# EAGLE board TC board (EAGLE 8.0.1)
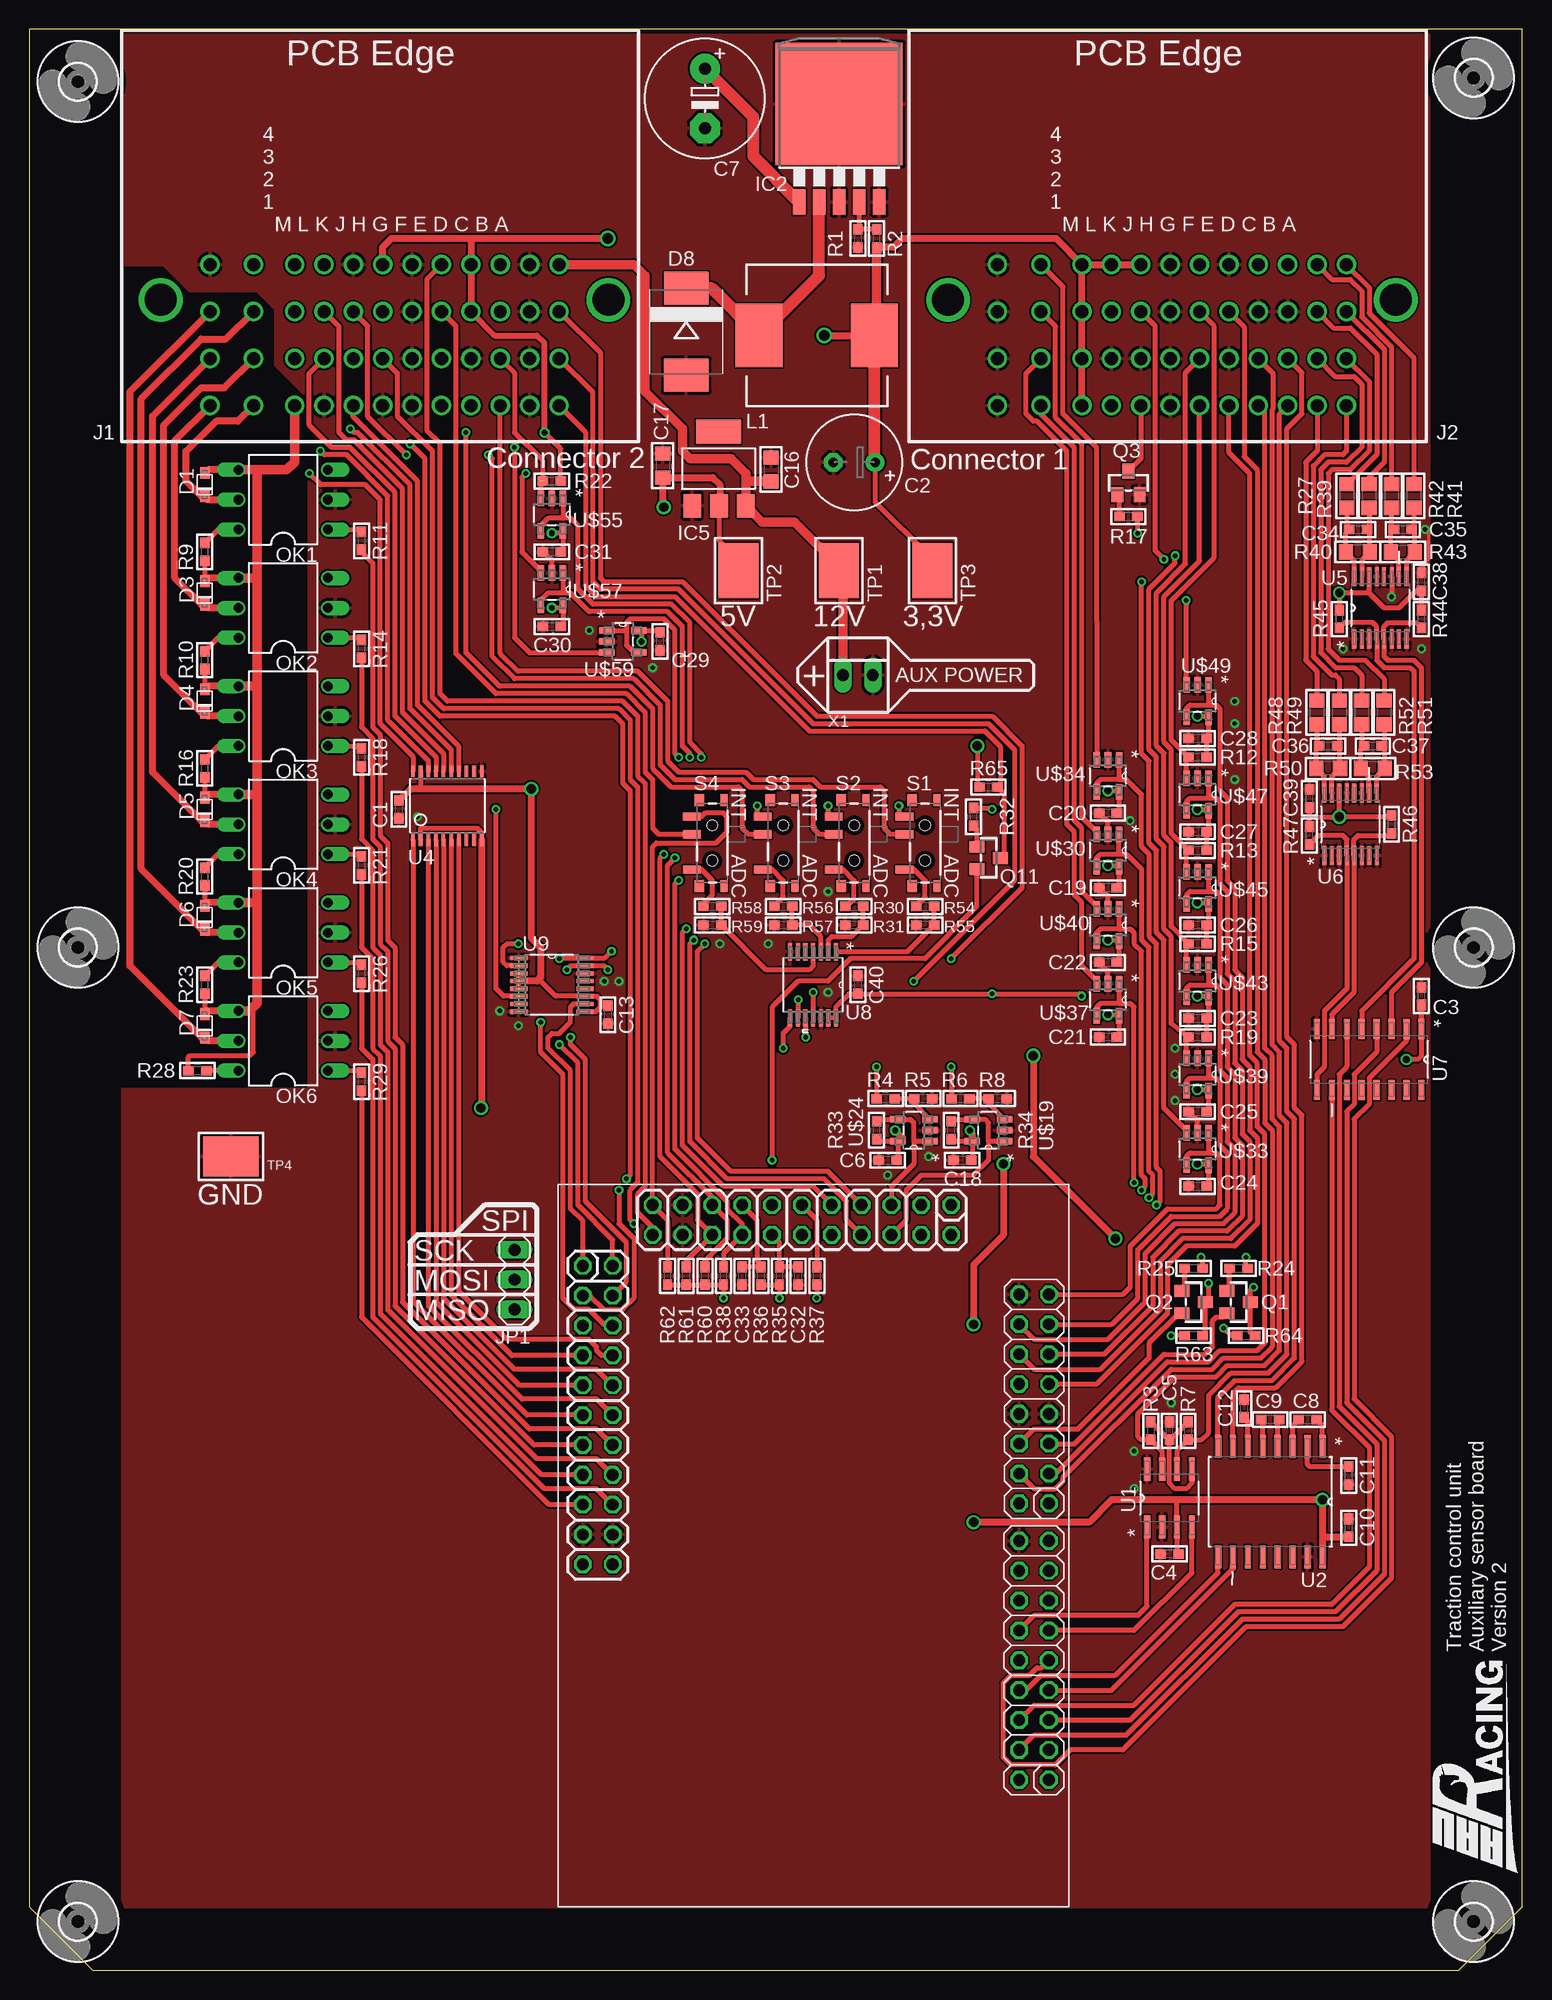
[diagram p0: board, top side]
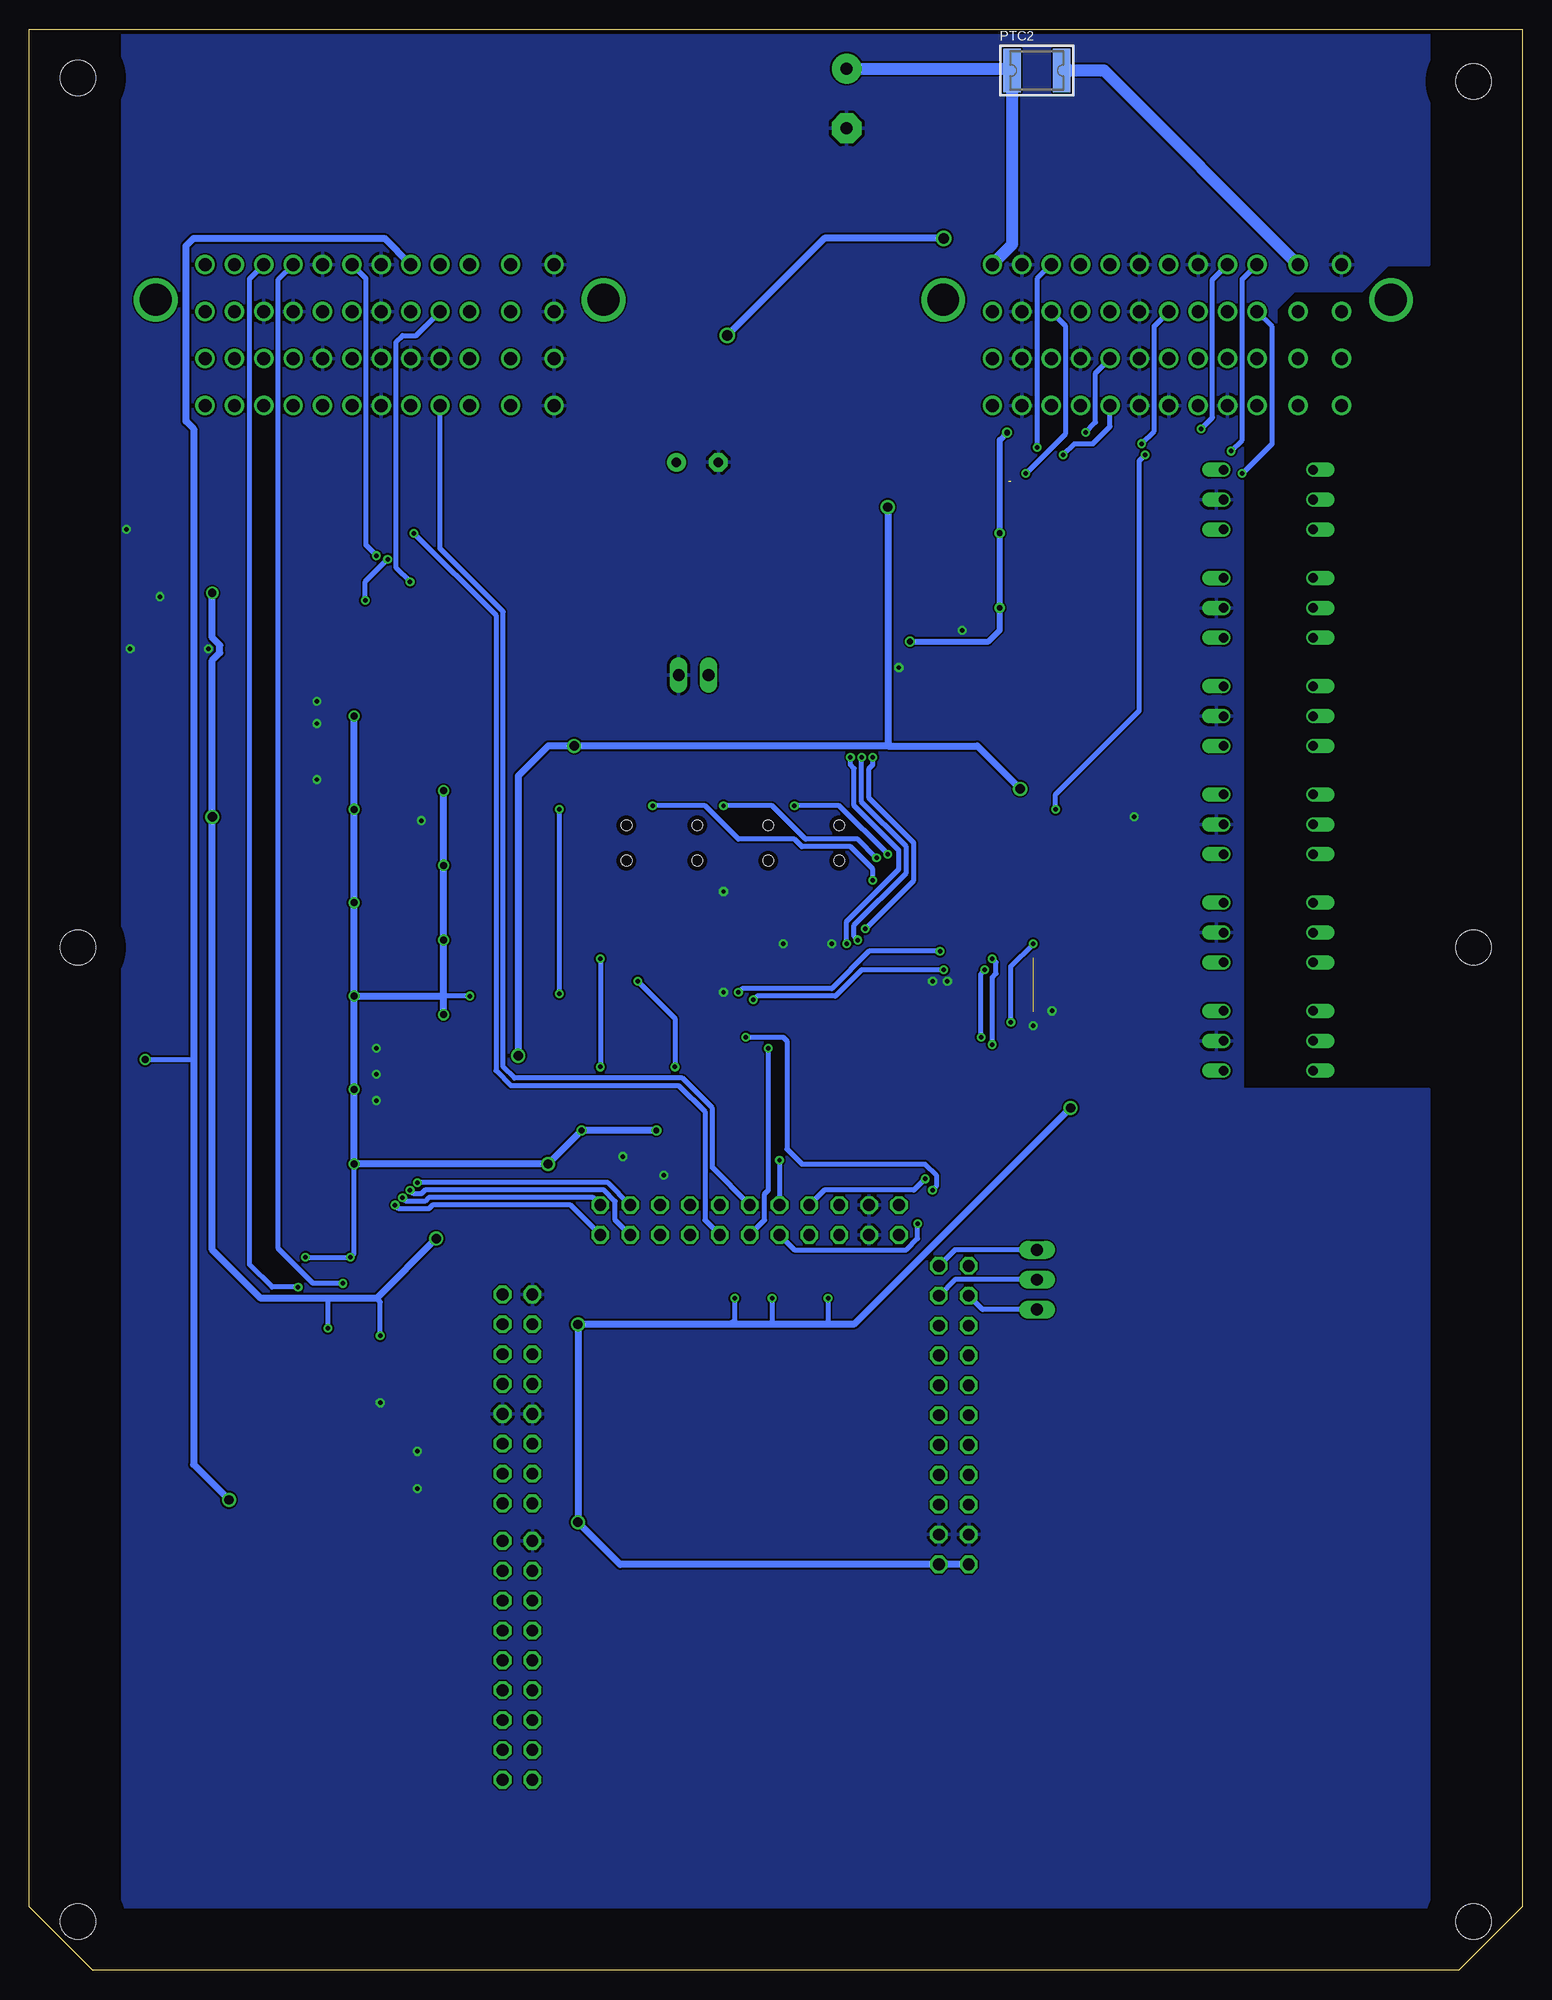
[diagram p1: board, bottom side, seen from below]

Size 127 x 165.1 mm. Coordinates in mm from the lower left corner, seen from the top.
Outline: 0,165.1 0,5.4 5.4,0 121.6,0 127,5.4 127,165.1 0,165.1
Copper layers (1*16): Top 0.0356mm / dielectric 1.5011mm / Bottom 0.0356mm
Design rules "LaenPCBOrder": minimum track width 6mil, minimum drill 13mil, track to track 6mil, track to pad 6mil, pad to pad 6mil, via to via 6mil, smd to smd 6mil, copper to edge 15mil, drill to drill 6mil, minimum pad ring 7mil, minimum via ring 7mil, stop-mask expansion 3mil, vias tented up to drill 0mil, thermal gap 10mil

## Footprints (pad centres in the part's own frame; a part is rotated, then mirrored left to right if it is on the bottom)
_0603 = smd 0.9 x 0.8: 1 -0.762,0; 2 0.762,0
E3,5-8 = drill 0.813 pad 1.6: + -1.778,0 | drill 0.813 pad 1.6 octagon: - 1.778,0
E5-10,5 = drill 1.016 pad 2.54: + -2.54,0 | drill 1.016 pad 2.54 octagon: - 2.54,0
_0805 = smd 1.2 x 1.3: 1 -1.016,0; 2 1.016,0
SOD-323F = smd 1 x 0.8: A -1,0; C 1,0
SMC = smd 2.8 x 3.8: A 3.7,0; C -3.7,0
3,0 = hole 3: 0,0
TO263-5 = smd 1.067 x 2.159: 1 -3.404,-5.791; 2 -1.702,-5.791; 3 0,-5.791; 4 1.702,-5.791; 5 3.404,-5.791 | smd 10.8 x 10.41: 6 0,2.54
SOT223 = smd 1.499 x 2.007: 1 -2.261,-3.15; 2 0.025,-3.15; 3 2.311,-3.15 | smd 3.81 x 2.007: 4 0,3.15
AUTOCONNECTOR = drill 1.1: A1 15.22,-6.92; A2 15.22,-2.92; A3 15.22,1.08; A4 15.22,5.08; B1 12.72,-6.92; B2 12.72,-2.92; B3 12.72,1.08; B4 12.72,5.08; C1 10.22,-6.92; C2 10.22,-2.92; C3 10.22,1.08; C4 10.22,5.08; D1 7.72,-6.92; D2 7.72,-2.92; D3 7.72,1.08; D4 7.72,5.08; E1 5.22,-6.92; E2 5.22,-2.92; E3 5.22,1.08; E4 5.22,5.08; F1 2.72,-6.92; F2 2.72,-2.92; F3 2.72,1.08; F4 2.72,5.08; G1 0.22,-6.92; G2 0.22,-2.92; G3 0.22,1.08; G4 0.22,5.08; H1 -2.28,-6.92; H2 -2.28,-2.92; H3 -2.28,1.08; H4 -2.28,5.08; J1 -4.78,-6.92; J2 -4.78,-2.92; J3 -4.78,1.08; J4 -4.78,5.08; K1 -7.28,-6.92; K2 -7.28,-2.92; K3 -7.28,1.08; K4 -7.28,5.08; L1 -10.78,-6.92; L2 -10.78,-2.92; L3 -10.78,1.08; L4 -10.78,5.08; M1 -14.48,-6.92; M2 -14.48,-2.92; M3 -14.48,1.08; M4 -14.48,5.08 | drill 2.7: SHIELD1 19.42,2.08; SHIELD2 -18.68,2.08
1X03 = drill 1.016 long: 1 -2.54,0; 2 0,0; 3 2.54,0
CDRH125 = smd 5.4 x 4: 1 0,4.9; 2 0,-4.9
DIL06 = drill 0.813 offset: 1 -2.54,-3.81; 2 0,-3.81; 3 2.54,-3.81; 4 2.54,3.81; 5 0,3.81; 6 -2.54,3.81
PTC1812 = smd 1.5 x 3.7: P$1 -2.1,0; P$2 2.1,0
SOT23-WIDE = smd 1 x 1.27: 1 -0.95,-1; 2 0.95,-1; 3 0,1
SWITCH-SPST-SMD-A = smd 0.7 x 1.5: 1 -2.25,-1.75; 2 -0.75,-1.75; 3 2.25,-1.75 | smd 1 x 0.6: GND1 -3.65,1; GND3 3.65,1 | smd 1 x 0.8: GND2 -3.65,-1.1; GND4 3.65,-1.1 | hole 0.9: -1.5,0; 1.5,0
TESTPOINT_SMT = smd 4.7 x 3.4: P$1 0,0
SOIC127P600X175-8N = smd 1.981 x 0.533: 1 -2.464,1.905; 2 -2.464,0.635; 3 -2.464,-0.635; 4 -2.464,-1.905; 5 2.464,-1.905; 6 2.464,-0.635; 7 2.464,0.635; 8 2.464,1.905
SOIC127P1032X265-16N = smd 1.981 x 0.533: 1 -4.699,4.445; 2 -4.699,3.175; 3 -4.699,1.905; 4 -4.699,0.635; 5 -4.699,-0.635; 6 -4.699,-1.905; 7 -4.699,-3.175; 8 -4.699,-4.445; 9 4.699,-4.445; 10 4.699,-3.175; 11 4.699,-1.905; 12 4.699,-0.635; 13 4.699,0.635; 14 4.699,1.905; 15 4.699,3.175; 16 4.699,4.445
TSSOP20 = smd 0.305 x 0.991: 1 -2.925,-2.918; 2 -2.275,-2.918; 3 -1.625,-2.918; 4 -0.975,-2.918; 5 -0.325,-2.918; 6 0.325,-2.918; 7 0.975,-2.918; 8 1.625,-2.918; 9 2.275,-2.918; 10 2.925,-2.918; 11 2.925,2.918; 12 2.275,2.918; 13 1.625,2.918; 14 0.975,2.918; 15 0.325,2.918; 16 -0.325,2.918; 17 -0.975,2.918; 18 -1.625,2.918; 19 -2.275,2.918; 20 -2.925,2.918
SOP63P600X175-16N = smd 1.6 x 0.356: 1 -2.667,2.235; 2 -2.667,1.575; 3 -2.667,0.965; 4 -2.667,0.305; 5 -2.667,-0.305; 6 -2.667,-0.965; 7 -2.667,-1.575; 8 -2.667,-2.235; 9 2.667,-2.235; 10 2.667,-1.575; 11 2.667,-0.965; 12 2.667,-0.305; 13 2.667,0.305; 14 2.667,0.965; 15 2.667,1.575; 16 2.667,2.235
SOIC127P600X175-16N = smd 1.702 x 0.533: 1 -2.591,4.445; 2 -2.591,3.175; 3 -2.591,1.905; 4 -2.591,0.635; 5 -2.591,-0.635; 6 -2.591,-1.905; 7 -2.591,-3.175; 8 -2.591,-4.445; 9 2.591,-4.445; 10 2.591,-3.175; 11 2.591,-1.905; 12 2.591,-0.635; 13 2.591,0.635; 14 2.591,1.905; 15 2.591,3.175; 16 2.591,4.445
SOP65P640X120-14N = smd 1.473 x 0.356: 1 -2.819,1.956; 2 -2.819,1.295; 3 -2.819,0.66; 4 -2.819,0; 5 -2.819,-0.66; 6 -2.819,-1.295; 7 -2.819,-1.956; 8 2.819,-1.956; 9 2.819,-1.295; 10 2.819,-0.66; 11 2.819,0; 12 2.819,0.66; 13 2.819,1.295; 14 2.819,1.956
SOP65P640X120-16N = smd 1.473 x 0.356: 1 -2.819,2.286; 2 -2.819,1.626; 3 -2.819,0.965; 4 -2.819,0.33; 5 -2.819,-0.33; 6 -2.819,-0.965; 7 -2.819,-1.626; 8 -2.819,-2.286; 9 2.819,-2.286; 10 2.819,-1.626; 11 2.819,-0.965; 12 2.819,-0.33; 13 2.819,0.33; 14 2.819,0.965; 15 2.819,1.626; 16 2.819,2.286
CPU-BOARD-JP1 = drill 1 octagon: P$1 1.27,-12.7; P$2 -1.27,-12.7; P$3 1.27,-10.16; P$4 -1.27,-10.16; P$5 1.27,-7.62; P$6 -1.27,-7.62; P$7 1.27,-5.08; P$8 -1.27,-5.08; P$9 1.27,-2.54; P$10 -1.27,-2.54; P$11 1.27,0; P$12 -1.27,0; P$13 1.27,2.54; P$14 -1.27,2.54; P$15 1.27,5.08; P$16 -1.27,5.08; P$17 1.27,7.62; P$18 -1.27,7.62; P$19 1.27,10.16; P$20 -1.27,10.16; P$21 1.27,12.7; P$22 -1.27,12.7; P$23 -3.905,18.637; P$24 -3.905,16.097; P$25 -6.445,18.637; P$26 -6.445,16.097; P$27 -8.985,18.637; P$28 -8.985,16.097; P$29 -11.525,18.637; P$30 -11.525,16.097; P$31 -14.065,18.637; P$32 -14.065,16.097; P$33 -16.605,18.637; P$34 -16.605,16.097; P$35 -19.145,18.637; P$36 -19.145,16.097; P$37 -21.685,18.637; P$38 -21.685,16.097; P$39 -24.225,18.637; P$40 -24.225,16.097; P$41 -26.765,18.637; P$42 -26.765,16.097; P$43 -29.305,18.637; P$44 -29.305,16.097; P$45 -47.625,-21.018; P$46 -47.625,-18.479; P$47 -45.085,-21.018; P$48 -45.085,-18.479; P$49 -42.545,-21.018; P$50 -42.545,-18.479; P$51 -40.005,-21.018; P$52 -40.005,-18.479; P$53 -37.465,-21.018; P$54 -37.465,-18.479; P$55 -34.925,-21.018; P$56 -34.925,-18.479; P$57 -32.385,-21.018; P$58 -32.385,-18.479; P$59 -29.845,-21.018; P$60 -29.845,-18.479; P$61 -27.305,-21.018; P$62 -27.305,-18.479; P$63 -24.115,-21.024; P$64 -24.115,-18.484; P$65 -21.575,-21.024; P$66 -21.575,-18.484; P$67 -19.035,-21.024; P$68 -19.035,-18.484; P$69 -16.495,-21.024; P$70 -16.495,-18.484; P$71 -13.955,-21.024; P$72 -13.955,-18.484; P$73 -11.415,-21.024; P$74 -11.415,-18.484; P$75 -8.875,-21.024; P$76 -8.875,-18.484; P$77 -6.335,-21.024; P$78 -6.335,-18.484
SOT95P270X145-5N = smd 1.321 x 0.559: 1 -1.372,0.94; 2 -1.372,0; 3 -1.372,-0.94; 4 1.372,-0.94; 5 1.372,0.94
22-23-2021 = drill 1 long: 1 -1.27,0; 2 1.27,0

## Placement (x,y rotation side)
C1  100n  [_0603]  31.43,98.74 90 top
C2  220uf  [E3,5-8]  70.17,128.27 180 top
C3  100n  [_0603]  118.43,82.87 90 top
C4  100n  [_0603]  97,35.4 180 top
C5  4n7  [_0603]  97,45.88 90 top
C6  100n  [_0603]  73.03,68.9 0 top
C7  680u  [E5-10,5]  57.47,159.23 270 top
C8  100n  [_0603]  108.74,46.83 180 top
C9  100n  [_0603]  105.57,46.83 180 top
C10  100n  [_0603]  112.24,37.62 270 top
C11  100n  [_0603]  112.24,42.07 270 top
C12  100n  [_0603]  103.35,47.78 270 top
C13  100n  [_0603]  49.21,81.28 270 top
C16  10u  [_0805]  63.09,127.67 270 top
C17  22u  [_0805]  53.88,127.98 270 top
C18  100n  [_0603]  79.38,68.9 0 top
C19  100n  [_0603]  91.76,92.08 0 top
C20  100n  [_0603]  91.76,98.42 0 top
C21  100n  [_0603]  91.76,79.38 0 top
C22  100n  [_0603]  91.76,85.72 0 top
C23  100n  [_0603]  99.38,80.96 0 top
C24  100n  [_0603]  99.38,66.67 0 top
C25  100n  [_0603]  99.38,73.03 0 top
C26  100n  [_0603]  99.38,88.9 0 top
C27  100n  [_0603]  99.38,96.84 0 top
C28  100n  [_0603]  99.38,104.78 0 top
C29  100n  [_0603]  53.66,113.03 90 top
C30  100n  [_0603]  44.45,114.3 0 top
C31  100n  [_0603]  44.45,120.65 0 top
C32  10n  [_0603]  65.41,59.05 270 top
C33  10n  [_0603]  60.64,59.05 270 top
C34  1n  [_0603]  113.03,122.56 0 top
C35  1n  [_0603]  116.84,122.56 180 top
C36  1n  [_0603]  110.49,104.14 0 top
C37  1n  [_0603]  114.3,104.14 180 top
C38  100n  [_0603]  118.43,118.11 90 top
C39  100n  [_0603]  108.9,99.69 90 top
C40  100n  [_0603]  70.48,83.82 90 top
D1  [SOD-323F]  14.92,126.36 270 top
D3  [SOD-323F]  14.92,117.16 270 top
D4  [SOD-323F]  14.92,107.95 270 top
D5  [SOD-323F]  14.92,98.74 270 top
D6  [SOD-323F]  14.92,89.53 270 top
D7  [SOD-323F]  14.92,80.33 270 top
D8  [SMC]  55.88,139.38 270 top
H1  MOUNT-HOLE3.0  [3,0]  4.13,160.66 0 top
H2  MOUNT-HOLE3.0  [3,0]  4.13,87 0 top
H3  MOUNT-HOLE3.0  [3,0]  4.13,4.13 0 top
H4  MOUNT-HOLE3.0  [3,0]  122.87,4.13 0 top
H5  MOUNT-HOLE3.0  [3,0]  122.87,160.97 0 top
H6  MOUNT-HOLE3.0  [3,0]  122.87,87 0 top
IC2  lm2575  [TO263-5]  68.9,156.21 0 top
IC5  REG1117  [SOT223]  58.64,127.73 0 top
J1  CON1  [AUTOCONNECTOR]  29.84,140.02 0 top
J2  CON1  [AUTOCONNECTOR]  96.84,140.02 0 top
JP1  SPI  [1X03]  41.27,58.74 90 top
L1  MSS1278-224KLD  [CDRH125]  66.99,139.06 90 top
OK1  4N35  [DIL06]  21.59,125.09 90 top
OK2  4N35  [DIL06]  21.59,115.89 90 top
OK3  4N35  [DIL06]  21.59,106.68 90 top
OK4  4N35  [DIL06]  21.59,97.47 90 top
OK5  4N35  [DIL06]  21.59,88.27 90 top
OK6  4N35  [DIL06]  21.59,79.06 90 top
PTC2  [PTC1812]  41.27,161.61 0 bottom
Q1  [SOT23-WIDE]  102.87,56.83 270 top
Q2  [SOT23-WIDE]  99.06,56.83 270 top
Q3  [SOT23-WIDE]  93.5,126.52 0 top
Q11  [SOT23-WIDE]  81.6,94.61 270 top
R1  1k  [_0603]  70.48,147.32 90 top
R2  1k69  [_0603]  72.07,147.32 90 top
R3  60  [_0603]  95.41,45.88 90 top
R4  499  [_0603]  72.87,74.14 180 top
R5  976  [_0603]  76.04,74.14 180 top
R6  499  [_0603]  79.22,74.14 180 top
R7  60  [_0603]  98.58,45.88 90 top
R8  976  [_0603]  82.39,74.14 180 top
R9  500  [_0603]  14.92,120.65 270 top
R10  500  [_0603]  14.92,111.44 270 top
R11  120  [_0603]  28.26,121.6 270 top
R12  10k  [_0603]  99.38,103.19 180 top
R13  10k  [_0603]  99.38,95.25 180 top
R14  120  [_0603]  28.26,112.39 270 top
R15  10k  [_0603]  99.38,87.31 180 top
R16  500  [_0603]  14.92,102.23 270 top
R17  500  [_0603]  93.5,123.67 0 top
R18  120  [_0603]  28.26,103.19 270 top
R19  10k  [_0603]  99.38,79.38 180 top
R20  500  [_0603]  14.92,93.03 270 top
R21  120  [_0603]  28.26,93.98 270 top
R22  10k  [_0603]  44.45,126.68 180 top
R23  500  [_0603]  14.92,83.82 270 top
R24  500  [_0603]  102.87,59.69 180 top
R25  500  [_0603]  99.06,59.69 180 top
R26  120  [_0603]  28.26,84.77 270 top
R27  10k 0W5  [_0805]  112.08,125.41 270 top
R28  500  [_0603]  14.29,76.52 180 top
R29  120  [_0603]  28.26,75.56 270 top
R30  499  [_0603]  70.17,90.49 180 top
R31  976  [_0603]  70.17,88.9 0 top
R32  500  [_0603]  80.33,98.11 270 top
R33  10k  [_0603]  72.07,71.44 270 top
R34  10k  [_0603]  78.42,71.44 270 top
R35  10k  [_0603]  63.82,59.05 90 top
R36  10k  [_0603]  62.23,59.05 90 top
R37  10k  [_0603]  66.99,59.05 90 top
R38  10k  [_0603]  59.05,59.05 90 top
R39  10k 0W5  [_0805]  113.98,125.41 270 top
R40  [_0805]  113.03,120.65 180 top
R41  10k 0W5  [_0805]  117.79,125.41 270 top
R42  10k 0W5  [_0805]  115.89,125.41 270 top
R43  [_0805]  116.84,120.65 0 top
R44  1k  [_0603]  118.43,114.94 90 top
R45  1k  [_0603]  111.44,114.94 90 top
R46  1k  [_0603]  115.89,97.47 90 top
R47  1k  [_0603]  108.9,96.52 90 top
R48  10k 0W5  [_0805]  109.54,107 270 top
R49  10k 0W5  [_0805]  111.44,107 270 top
R50  [_0805]  110.49,102.23 180 top
R51  10k 0W5  [_0805]  115.25,107 270 top
R52  10k 0W5  [_0805]  113.35,107 270 top
R53  [_0805]  114.3,102.23 0 top
R54  499  [_0603]  76.2,90.49 180 top
R55  976  [_0603]  76.2,88.9 0 top
R56  499  [_0603]  64.14,90.49 180 top
R57  976  [_0603]  64.14,88.9 0 top
R58  499  [_0603]  58.1,90.49 180 top
R59  976  [_0603]  58.1,88.9 0 top
R60  10k  [_0603]  57.47,59.05 90 top
R61  10k  [_0603]  55.88,59.05 90 top
R62  10k  [_0603]  54.29,59.05 90 top
R63  500  [_0603]  99.06,53.98 0 top
R64  500  [_0603]  103.5,53.98 0 top
R65  500  [_0603]  81.6,100.65 0 top
S1  [SWITCH-SPST-SMD-A]  76.2,95.89 270 top
S2  [SWITCH-SPST-SMD-A]  70.17,95.89 270 top
S3  [SWITCH-SPST-SMD-A]  64.14,95.89 270 top
S4  [SWITCH-SPST-SMD-A]  58.1,95.89 270 top
TP1  [TESTPOINT_SMT]  68.9,119.06 90 top
TP2  [TESTPOINT_SMT]  60.33,119.06 90 top
TP3  [TESTPOINT_SMT]  76.83,119.06 90 top
TP4  [TESTPOINT_SMT]  17.14,69.22 0 top
U1  MAX13052ESA+  [SOIC127P600X175-8N]  97,40.16 90 top
U2  MAX232AEWE+  [SOIC127P1032X265-16N]  105.57,39.85 270 top
U4  [TSSOP20]  35.56,99.06 0 top
U5  MAX9926  [SOP63P600X175-16N]  114.94,115.89 90 top
U6  MAX9926  [SOP63P600X175-16N]  112.39,97.47 90 top
U7  HEF4049BT  [SOIC127P600X175-16N]  113.98,77.47 270 top
U8  MCP3004-I/ST  [SOP65P640X120-14N]  66.67,83.82 270 top
U9  AD5024BRUZ  [SOP65P640X120-16N]  44.45,83.82 0 top
U$1  CPU-BOARD  [CPU-BOARD-JP1]  65.72,63.82 90 top
U$19  MCP6001T-E/OT  [SOT95P270X145-5N]  81.6,71.44 180 top
U$24  MCP6001T-E/OT  [SOT95P270X145-5N]  75.25,71.44 180 top
U$30  MCP6001T-E/OT  [SOT95P270X145-5N]  91.76,95.25 270 top
U$33  MCP6001T-E/OT  [SOT95P270X145-5N]  99.38,69.85 270 top
U$34  MCP6001T-E/OT  [SOT95P270X145-5N]  91.76,101.6 270 top
U$37  MCP6001T-E/OT  [SOT95P270X145-5N]  91.76,82.55 270 top
U$39  MCP6001T-E/OT  [SOT95P270X145-5N]  99.38,76.2 270 top
U$40  MCP6001T-E/OT  [SOT95P270X145-5N]  91.76,88.9 270 top
U$43  MCP6001T-E/OT  [SOT95P270X145-5N]  99.38,84.14 270 top
U$45  MCP6001T-E/OT  [SOT95P270X145-5N]  99.38,92.08 270 top
U$47  MCP6001T-E/OT  [SOT95P270X145-5N]  99.38,100.01 270 top
U$49  MCP6001T-E/OT  [SOT95P270X145-5N]  99.38,107.95 270 top
U$55  MCP6001T-E/OT  [SOT95P270X145-5N]  44.45,123.83 270 top
U$57  MCP6001T-E/OT  [SOT95P270X145-5N]  44.45,117.47 270 top
U$59  MCP6001T-E/OT  [SOT95P270X145-5N]  50.48,113.03 0 top
X1  [22-23-2021]  70.48,110.17 0 top

## Library data of the parts
C1 C3-C6 C8-C13 C16-C40 PTC2 Q1-Q3 Q11 R1-R65 TP1-TP4 = microbuilder
C2 C7 = rcl
D1 D3-D7 U4 = adafruit
D8 = diode
H1-H6 = holes
IC2 = linear
IC5 = burr-brown; MPN: REG1117; OC_FARNELL: 1097566; OC_NEWARK: 14P6981
J1 J2 U$1 = unicorn_v2
JP1 = pinhead
L1 = SparkFun-Passives
OK1-OK6 = optocoupler; MF: FAIRCHILD SEMICONDUCTOR; MPN: 4N35; OC_FARNELL: 1328375; OC_NEWARK: 72K9946
S1-S4 = SparkFun-Electromechanical; PROD_ID: SWCH-10651
U1 = Maxim_By_element14_Batch_1; MPN: MAX13052ESA+; OC_FARNELL: 1600112; OC_NEWARK: 99K2875; PACKAGE: SOIC-8; SUPPLIER: Maxim
U2 = Maxim_By_element14_Batch_1; MPN: MAX232AEWE+; OC_FARNELL: 9724400; OC_NEWARK: 67K4435; PACKAGE: SOIC-16; SUPPLIER: Maxim
U5 U6 = Maxim_By_element14_Batch_1; MPN: MAX9927AEE+; OC_FARNELL: 1845723; OC_NEWARK: 80P4723; PACKAGE: QSOP-16; SUPPLIER: Maxim
U7 = NXP_By_element14_Batch_1; MPN: HEF4049BT; OC_FARNELL: 1201290; OC_NEWARK: 25M9617; PACKAGE: SOIC-16; SUPPLIER: NXP
U8 = Microchip_By_element14_Batch_1; MPN: MCP3004-I/ST; OC_FARNELL: 1523365; OC_NEWARK: 74M3032; PACKAGE: 14TSSOP; SUPPLIER: Microchip
U9 = AAU-Racing; MPN: AD5024BRUZ; OC_FARNELL: 2067817; OC_NEWARK: 07P8929; PACKAGE: TSSOP-16; SUPPLIER: Analog Devices
U$19 U$24 U$30 U$33 U$34 U$37 U$39 U$40 U$43 U$45 U$47 U$49 U$55 U$57 U$59 = Microchip_By_element14_Batch_1; MPN: MCP6001T-E/OT; OC_FARNELL: 1332116; OC_NEWARK: 34M7471; PACKAGE: SOT23-5; SUPPLIER: Microchip
X1 = con-molex; MF: MOLEX; MPN: 22-23-2021; OC_FARNELL: 1462926; OC_NEWARK: 25C3832

## Nets
3.3V: C2.+ C3.1 C4.1 C6.2 C10.2 C18.2 C19.2 C20.2 C21.2 C22.2 C23.2 C24.2 C25.2 C26.2 C27.2 C28.2 C29.2 C30.2 C31.2 C40.1 J1.D3 J1.D4 J1.G4 J2.H4 J2.J4 J2.K1 J2.K2 J2.K3 J2.K4 L1.2 R2.1 R12.1 R13.1 R15.1 R19.1 R22.1 R24.1 R25.1 R32.1 R33.2 R34.2 R35.1 R36.1 R37.1 R38.1 R60.1 R61.1 R62.1 TP3.P$1 U1.3 U2.16 U4.2 U4.10 U7.1 U8.13 U8.14 U$1.P$43 U$1.P$44 U$19.5 U$24.5 U$30.5 U$33.5 U$34.5 U$37.5 U$39.5 U$40.5 U$43.5 U$45.5 U$47.5 U$49.5 U$55.5 U$57.5 U$59.5
5.0V: C1.2 C13.1 C17.2 C38.1 C39.1 IC5.2 R44.2 R45.2 R46.2 R47.2 R63.1 R64.1 R65.1 TP2.P$1 U4.19 U5.14 U6.14 U9.3 U9.4 U9.5 U9.9 U9.11
12V: C7.+ C16.2 IC2.1 IC5.3 J1.A4 PTC2.P$1 TP1.P$1 X1.1
ADC_CS: U8.8 U$1.P$12
AUX2: J1.E1 S2.2
AUX2I: R60.2 S2.1 U$1.P$17
AUX3: J1.E2 S3.2
AUX3I: R61.2 S3.1 U$1.P$18
AUX4: J1.E3 S4.2
AUX4I: R62.2 S4.1 U$1.P$21
AUX5: J1.E4 U$1.P$22
AUX6: J2.E1 U$1.P$65
AUX7: J2.E3 U$1.P$66
BITE: J1.A1 Q11.3 R65.2
BITEL: Q11.2 U$1.P$13
BRAKE-POT: J1.C3 U$57.3
BRAKE-POTB: U$1.P$8 U$57.1 U$57.4
BRAKEP: J2.F4 R19.2 U$39.3
BRAKEP2: J2.F2 R15.2 U$43.3
BRAKEP2B: U$1.P$76 U$43.1 U$43.4
BRAKEPB: U$1.P$75 U$39.1 U$39.4
CAN_RX: U1.4 U$1.P$55
CAN_TX: U1.1 U$1.P$56
CANH: J2.D2 R7.1 U1.6
CANL: J2.D1 R3.1 U1.7
CLUTCH-POT: J1.C4 U$59.3
CLUTCH-POTB: U$1.P$9 U$59.1 U$59.4
COMRX: U2.9 U$1.P$52
COMTX: U2.10 U$1.P$51
DACCLR: U9.10 U$1.P$23
DACCS: U9.2 U$1.P$28
ECU1: J2.C4 Q1.3 R64.2
ECU1L: Q1.2 U$1.P$67
ECU2: J2.D4 Q2.3 R63.2
ECU2L: Q2.2 U$1.P$68
ENCODER1: C32.1 J1.G2 R35.2 U$1.P$14
ENCODER2: C33.1 J1.G3 R36.2 U$1.P$15
FUELTEMP: J1.C2 R22.2 U$55.3
FUELTEMPB: U$1.P$7 U$55.1 U$55.4
GEARPOSAN: J2.H3 U$49.3
GEARPOSANB: U$1.P$71 U$49.1 U$49.4
GND: C1.1 C2.- C3.2 C4.2 C5.2 C6.1 C7.- C10.1 C11.2 C12.1 C13.2 C16.1 C17.1 C18.1 C19.1 C20.1 C21.1 C22.1 C23.1 C24.1 C25.1 C26.1 C27.1 C28.1 C29.1 C30.1 C31.1 C32.2 C33.2 C38.2 C39.2 C40.2 D8.A IC2.3 IC2.5 IC2.6 IC5.1 J1.B1 J1.B2 J1.B3 J1.B4 J1.D2 J1.F1 J1.F2 J1.F3 J1.F4 J1.G1 J1.H4 J1.J1 J1.M4 J2.C3 J2.D3 J2.E2 J2.E4 J2.G1 J2.G2 J2.G3 J2.G4 J2.H2 J2.J2 J2.M1 J2.M2 J2.M3 J2.M4 OK1.2 OK2.2 OK3.2 OK4.2 OK5.2 OK6.2 Q3.2 R1.1 R5.1 R8.1 R31.1 R55.1 R57.1 R59.1 TP4.P$1 U1.2 U1.8 U2.15 U4.11 U5.1 U5.3 U5.6 U5.8 U5.11 U5.13 U6.1 U6.3 U6.6 U6.8 U6.11 U6.13 U7.8 U8.7 U8.12 U9.1 U9.8 U9.14 U$1.P$19 U$1.P$20 U$1.P$41 U$1.P$42 U$1.P$62 U$1.P$69 U$1.P$70 U$1.P$78 U$19.2 U$24.2 U$30.2 U$33.2 U$34.2 U$37.2 U$39.2 U$40.2 U$43.2 U$45.2 U$47.2 U$49.2 U$55.2 U$57.2 U$59.2 X1.2
GND-RELAY: D1.A D3.A D4.A D5.A D6.A D7.A J1.K1 OK1.4 OK2.4 OK3.4 OK4.4 OK5.4 OK6.4 R9.2 R10.2 R16.2 R20.2 R23.2 R28.2
GSENS: J1.A2 R4.2
GSENSO: R33.1 U$1.P$5 U$24.1 U$24.4
HB1-DIR: U4.6 U$1.P$29
HB1-DIR-IN: J1.J4 U4.15
HB1-EN: U4.7 U$1.P$30
HB1-EN-IN: J1.H1 U4.14
HB1-PWM: U4.5 U$1.P$32
HB1-PWM-IN: J1.J3 U4.16
HB2-DIR: U4.3 U$1.P$34
HB2-DIR-IN: J1.K4 U4.18
HB2-EN: U4.1 U$1.P$33
HB2-EN-IN: J1.K3 U4.20
HB2-PWM: U4.4 U$1.P$31
HB2-PWM-IN: J1.J2 U4.17
IGNCUT: R17.2 U$1.P$10
IGNCUTO: J2.H1 Q3.3
MISO: JP1.1 U8.10 U$1.P$25
MOSI: JP1.2 U8.9 U9.15 U$1.P$26
N$1: IC2.4 R1.2 R2.2
N$2: D8.C IC2.2 L1.1
N$3: OK1.6 R9.1
N$4: Q11.1 R32.2
N$5: OK3.6 R16.1
N$6: OK1.1 R11.1
N$7: R4.1 R5.2 U$24.3
N$8: OK4.6 R20.1
N$9: OK2.6 R10.1
N$10: OK2.1 R14.1
N$11: C34.1 R27.2 R40.2 U5.16
N$12: C5.1 R3.2 R7.2 U1.5
N$13: C12.2 U2.6
N$14: C9.1 U2.4
N$15: C34.2 R39.2 R40.1 U5.15
N$16: OK3.1 R18.1
N$17: C35.1 R41.2 R43.2 U5.9
N$18: C35.2 R42.2 R43.1 U5.10
N$19: OK4.1 R21.1
N$20: C9.2 U2.5
N$21: C8.2 U2.3
N$22: C8.1 U2.1
N$23: C11.1 U2.2
N$24: Q3.1 R17.1
N$25: OK5.6 R23.1
N$26: OK6.6 R28.1
N$27: OK5.1 R26.1
N$28: R44.1 U5.5 U7.3
N$29: R46.1 U6.5 U7.7
N$30: R30.2 S2.3
N$31: R45.1 U5.4 U7.5
N$32: R6.1 R8.2 U$19.3
N$33: R47.1 U6.4 U7.9
N$34: Q1.1 R24.2
N$35: Q2.1 R25.2
N$36: C36.1 R48.2 R50.2 U6.16
N$38: OK6.1 R29.1
N$39: C37.1 R51.2 R53.2 U6.9
N$40: C37.2 R52.2 R53.1 U6.10
N$41: C36.2 R49.2 R50.1 U6.15
N$42: R54.1 R55.2 U8.1
N$43: R30.1 R31.2 U8.2
N$46: R56.2 S3.3
N$53: R56.1 R57.2 U8.3
N$57: R54.2 S1.3
N$62: R58.2 S4.3
N$65: R58.1 R59.2 U8.4
NEUTRAL: J2.J1 R37.2 U$1.P$11
OC1: R11.2 U$1.P$36
OC2: R14.2 U$1.P$35
OC3: R18.2 U$1.P$38
OC4: R21.2 U$1.P$37
OC5: R26.2 U$1.P$40
OC6: R29.2 U$1.P$39
OILP: J1.C1 S1.2
OILPI: R38.2 S1.1 U$1.P$16
RLY1: D1.C J1.L1 OK1.5
RLY2: D3.C J1.M1 OK2.5
RLY3: D4.C J1.L2 OK3.5
RLY4: D5.C J1.M2 OK4.5
RLY5: D6.C J1.L3 OK5.5
RLY6: D7.C J1.M3 OK6.5
RPM1: U7.10 U$1.P$50
RPM1GIN: J2.B4 R42.1
RPM1IN: J2.A4 R41.1
RPM2: U7.6 U$1.P$49
RPM2GIN: J2.B3 R27.1
RPM2IN: J2.A3 R39.1
RPM3: U7.4 U$1.P$48
RPM3GIN: J2.B2 R52.1
RPM3IN: J2.A2 R51.1
RPM4: U7.2 U$1.P$53
RPM4GIN: J2.B1 R48.1
RPM4IN: J2.A1 R49.1
RS232RX: J2.C1 U2.8
RS232TX: J2.C2 U2.7
SCK: JP1.3 U8.11 U9.16 U$1.P$24
SPEED: J2.J3 U$33.3
SPEEDB: U$1.P$77 U$33.1 U$33.4
TRAVEL1: J2.L3 U$30.3
TRAVEL1B: U$1.P$1 U$30.1 U$30.4
TRAVEL2: J2.L4 U$34.3
TRAVEL2B: U$1.P$2 U$34.1 U$34.4
TRAVEL3: J2.L2 U$37.3
TRAVEL3B: U$1.P$3 U$37.1 U$37.4
TRAVEL4: J2.L1 U$40.3
TRAVEL4B: U$1.P$4 U$40.1 U$40.4
VCC: J1.L4 PTC2.P$2
VOUT: J1.H3 U9.6
VTEMP: J2.F1 R13.2 U$45.3
VTEMP2: J2.F3 R12.2 U$47.3
VTEMP2B: U$1.P$74 U$47.1 U$47.4
VTEMPB: U$1.P$73 U$45.1 U$45.4
YAW: J1.A3 R6.2
YAWO: R34.1 U$1.P$6 U$19.1 U$19.4

## Tracks (layer width: path | path; a pad name or v marks a point on that pad's centre or on a via)
3.3V  (via drill 0.38, 0.5, 0.6, 0.8, 0.8 pad 0.25, 0.9)
  Top 0.406: R2.1 72.07,139.25 L1.2 | U4.10 38.48,96.77 38.1,97.16 33.28,97.16 U4.2 | C4.1 97.63,35.4 U1.3 97.63,39.85 97.79,40.01 | C10.2 111.89,36.83 | 80.28,54.98 v80.33,54.93 | U$24.5 72.25,70.5 R33.2 | U$24.5 73.88,68.99 C6.2 | R34.2 78.6,70.5 U$19.5 80.23,68.99 C18.2 80.33,68.71 | U$24.5 73.89,70.48 74.3,70.48 | C21.2 92.7,79.55 U$37.5 92.6,81.28 v91.76,81.28 | C22.2 92.7,85.9 U$40.5 92.6,87.63 v91.76,87.63 | C19.2 92.7,92.25 U$30.5 92.6,93.98 v91.76,93.98 | C20.2 92.7,98.6 U$34.5 92.6,100.33 v91.76,100.33 | C24.2 100.32,66.85 U$33.5 100.22,68.58 v99.38,68.58 | C25.2 100.32,73.2 U$39.5 100.22,74.93 v99.38,74.93 | v99.38,106.68 100.22,106.68 U$49.5 100.32,104.95 C28.2 R12.1 | v99.38,98.74 100.22,98.74 U$47.5 100.32,97.02 C27.2 R13.1 | v99.38,90.81 100.22,90.81 U$45.5 100.32,89.08 C26.2 R15.1 | v99.38,82.87 100.22,82.87 U$43.5 100.32,81.14 C23.2 R19.1 | C29.2 53.48,113.97 U$59.5 52.07,113.97 v52.07,113.03 | C31.2 45.39,120.65 U$55.5 45.39,122.24 v44.45,122.24 | C30.2 45.39,114.3 U$57.5 45.39,115.89 v44.45,115.89 | v63.82,57.15 R35.1 R36.1 | R37.1 v66.99,57.15 | R22.1 45.21,129.41 v43.81,130.81 | U7.1 C3.1 118.43,77.79 118.11,77.47 v117.16,77.47 | U8.13 U8.14 68.63,81.97 69.72,83.06 C40.1 v81.92,83.06 89.34,83.06 v89.53,82.87 | v59.05,57.15 R38.1 R60.1 R61.1 R62.1 | R32.1 81.79,98.87 v81.92,98.74 | R25.1 99.82,60.52 v99.69,60.64 | R24.1 103.5,59.82 v103.5,60.64 | C2.+ 71.94,124.9 76.52,120.33 76.83,120.33 TP3.P$1
  Top 0.508: v43.81,130.81 43.81,138.43 43.18,139.06 39.6,139.06 J1.D3
  Top 0.61: R2.1 73.53,146.56 74.3,147.32 87.33,147.32 J2.K4 | 110.01,36.83 v110.01,40.01 97.79,40.01 92.08,40.01 90.17,38.1 v80.33,38.1 | 110.01,36.83 U2.16 | 111.89,36.83 110.01,36.83 | 74.3,70.48 74.3,70.8 v73.66,71.44 | U$19.5 80.23,71.22 v80.01,71.44 | v82.87,68.58 82.87,62.55 80.33,60.01 v80.33,54.93 | U4.10 38.48,73.28 v38.42,73.34 | J2.K1 J2.K2 J2.K3 J2.K4 | J2.K4 J2.J4 J2.H4 | J1.D3 J1.D4 37.56,147.32 | J1.G4 30.07,146.59 30.8,147.32 37.56,147.32 | 37.56,147.32 v49.21,147.32 | v67.63,139.06 71.26,139.06 71.89,138.43
  Top 0.813: R2.1 72.07,138.43
  Top 1.016: C2.+ 71.89,128.27 71.89,138.43 L1.2
  Bottom 0.406: v117.16,77.47 113.03,77.47 | v63.82,57.15 63.82,54.98 | v66.99,57.15 66.99,55.29 67.31,54.98 | v89.53,82.87 91.76,82.87 | v59.05,57.15 59.05,54.98 | v81.92,98.74 v81.92,83.06 | v99.38,68.58 99.38,60.96 v99.69,60.64 v103.5,60.64
  Bottom 0.508: v52.07,113.03 45.4,113.03 44.45,113.98 v44.45,115.89 v44.45,122.24 44.45,130.18 v43.81,130.81
  Bottom 0.61: v73.66,71.44 v80.01,71.44 v82.87,68.58 v99.38,68.58 v99.38,74.93 v99.38,82.87 | v91.76,81.28 91.76,82.87 | 91.76,82.87 v91.76,87.63 v91.76,93.98 v91.76,100.33 | v110.01,40.01 113.03,43.02 113.03,77.47 113.03,131.13 113.67,131.76 113.67,146.69 113.03,147.32 96.78,147.32 J2.H4 | v99.38,82.87 v99.38,90.81 v99.38,98.74 v99.38,106.68 | v49.21,147.32 59.37,147.32 v67.63,139.06 | U$1.P$43 U$1.P$44 76.74,34.51 v80.33,38.1 v80.33,54.93 80.33,54.98 67.31,54.98 63.82,54.98 59.05,54.98 56.78,54.98 v38.42,73.34 | v99.38,82.87 91.76,82.87
5.0V  (via drill 0.38, 0.7, 0.8)
  Top 0.406: 108.9,98.42 R47.2 108.9,98.11 v111.44,98.11 | 108.9,98.42 C39.1 | R46.2 115.7,98.42 115.38,98.11 v111.44,98.11 | 108.92,98.44 108.9,98.42 | R44.2 C38.1 117.98,117.35 116.52,115.89 115.25,115.89 113.98,117.16 | U4.19 33.28,100.54 33.34,100.49 | R45.2 v111.44,117.16 113.98,117.16 | U5.14 113.97,117.17 113.98,117.16 | v111.44,98.11 111.44,100.13 U6.14 | v80.64,104.14 80.64,100.84 R65.1 | R64.1 102.23,53.98 v101.6,54.61 | R63.1 v97.16,53.98 | U9.5 U9.4 U9.3 | 43.34,84.3 44.78,82.86 U9.11 48.27,82.86 48.58,82.55 48.58,81.92 | U9.9 48.2,81.53 48.58,81.92 | C13.1 48.7,82.04 48.58,81.92 | IC5.2 58.67,121.67 60.33,120.02 TP2.P$1
  Top 0.61: IC5.2 58.74,124.65 58.74,126.36 58.13,126.97 C17.2 53.88,124.56 v53.98,124.46 | v85.41,77.79 85.41,69.22 v92.39,62.23 | C1.2 32.42,100.49 33.34,100.49 v42.7,100.49 42.7,87.79 43.5,87 43.5,84.45 43.34,84.3 43.18,84.14 41.64,84.14 U9.4
  Bottom 0.406: v111.43,98.12 111.43,97.17 v111.44,98.11 | v97.16,53.98 97.16,56.83 97.47,57.15 | v101.6,54.61 101.6,57.15
  Bottom 0.61: v53.98,124.46 53.98,104.14 | 53.98,104.14 v80.64,104.14 82.87,104.14 85.41,101.6 v85.41,77.79 | 53.98,104.14 46.35,104.14 v42.7,100.49 | v111.44,117.16 111.44,113.35 110.81,112.71 110.81,112.08 111.44,111.44 v111.44,98.11 111.44,61.28 107.31,57.15 101.6,57.15 97.47,57.15 v92.39,62.23
12V
  Top 0.254: 69.22,118.43 69.22,118.75
  Top 0.406: 68.58,119.7 68.58,119.06 TP1.P$1 69.22,119.06 69.22,118.43
  Top 0.813: J1.A4 51.44,145.1 52.39,144.15 52.39,134.3 55.56,131.13 55.56,129.22 56.2,128.59 59.69,128.59 60.96,127.32 60.96,126.68 | 60.96,126.68 IC5.3 62.34,123.19 65.09,123.19 68.58,119.7 | C16.2 60.99,126.65 60.96,126.68 | X1.1 69.22,118.43
  Top 1.016: IC2.1 61.59,154.32 61.59,157.64 C7.+
  Bottom 1.016: J1.A4 45.09,145.12 43.38,146.83 PTC2.P$1 43.53,161.77 C7.+
ADC_CS  (via drill 0.38)
  Top 0.406: U8.8 64.72,80.28 64.14,79.69 v64.14,78.42
  Bottom 0.406: U$1.P$12 64.45,63.82 64.45,66.04 64.14,66.36 v64.14,78.42
AUX2  (via drill 0.38)
  Top 0.406: v39.05,128.91 39.37,128.59 39.37,111.76 41.27,109.86 51.44,109.86 53.66,107.63 53.66,102.55 54.93,101.28 60.64,101.28 61.28,100.65 66.36,100.65 66.67,100.33 66.67,97.16 67.19,96.64 S2.2
  Bottom 0.406: v39.05,128.91 38.1,129.86 36.51,129.86 35.06,131.31 J1.E1
AUX2I  (via drill 0.38)
  Top 0.406: 68.39,98.11 S2.1 67.94,98.14 v67.94,99.06 | R60.2 57.47,60.33 59.37,62.23 59.37,63.82 U$1.P$17 58.1,65.72 54.29,69.53 54.29,93.98 v54.93,94.61
  Bottom 0.406: v54.93,94.61 56.52,96.2 60.96,96.2 63.82,99.06 v67.94,99.06
AUX3  (via drill 0.38)
  Top 0.406: v37.15,130.81 37.15,112.08 40.01,109.22 51.12,109.22 53.02,107.31 53.02,102.23 54.61,100.65 60.33,100.65 60.64,100.33 60.64,97.16 61.16,96.64 S3.2
  Bottom 0.406: v37.15,130.81 36.29,131.67 36.29,135.87 J1.E2
AUX3I  (via drill 0.38)
  Top 0.406: R61.2 55.88,60.33 U$1.P$18 56.83,63.82 56.83,66.04 53.66,69.22 53.66,94.61 v53.98,94.93 | v61.91,99.06 61.91,98.14 S3.1
  Bottom 0.406: v53.98,94.93 58.1,99.06 v61.91,99.06
AUX4
  Top 0.406: J1.E3 36.29,139.87 36.29,111.98 39.69,108.58 50.8,108.58 52.39,107 52.39,101.92 53.02,101.28 53.02,97.16 53.54,96.64 S4.2
AUX4I
  Top 0.406: R62.2 54.29,63.82 U$1.P$21 53.02,95.57 53.34,95.89 58.42,95.89 59.37,96.84 59.37,98.11 59.05,98.42 57.47,98.42 57.15,98.11 56.38,98.11 S4.1 | S4.1 56.2,98.29 | 56.17,98.14 S4.1
AUX5
  Top 0.406: U$1.P$22 53.02,63.18 51.75,64.45 51.75,66.04 52.39,66.67 52.39,100.97 51.75,101.6 51.75,106.68 50.48,107.95 35.56,107.95 34.92,108.58 34.92,129.86 33.85,130.94 33.85,143.88 J1.E4
AUX6
  Top 0.406: U$1.P$65 87.33,42.24 96.84,51.75 100.33,51.75 101.28,52.7 104.46,52.7 105.09,53.34 105.09,71.12 104.46,71.75 104.46,77.15 103.82,77.79 103.82,127.32 102.06,129.08 J2.E1
AUX7
  Top 0.406: J2.E3 103.35,139.81 103.35,128.75 104.46,127.64 104.46,78.11 105.09,77.47 105.09,72.07 105.73,71.44 105.73,53.02 104.78,52.07 101.6,52.07 100.65,51.12 97.16,51.12 87.95,41.91 87.95,41.59 87.31,40.96 85.49,40.96 U$1.P$66
BITE
  Top 0.406: J1.A1 47.31,130.85 47.31,117.79 48.26,116.84 54.93,116.84 66.36,105.41 81.28,105.41 82.6,104.09 82.6,100.89 R65.2 82.92,100.09 82.92,94.93 Q11.3
BITEL  (via drill 0.38)
  Top 0.406: v63.18,68.9 63.18,81.92 65.41,84.14 67.94,84.14 69.85,86.04 76.2,86.04 80.14,90.04 80.6,90.5 Q11.2
  Bottom 0.406: v63.18,68.9 U$1.P$13
BRAKE-POT  (via drill 0.38)
  Top 0.406: U$57.3 43.51,119.05 41.91,120.65 41.91,127 v42.23,127.32
  Bottom 0.406: J1.C3 38.86,139.89 38.86,130.68 v42.23,127.32
BRAKE-POTB  (via drill 0.38)
  Top 0.406: U$1.P$8 69.53,63.82 69.53,65.41 67.63,67.31 59.37,67.31 56.2,70.48 56.2,87.31 v56.52,87.63 | 45.4,117.16 46.04,117.16 47.62,115.57 54.29,115.57 55.56,114.3 55.56,104.14 56.2,103.5 v56.2,103.19 | 45.4,117.16 44.13,117.16 43.51,116.53 U$57.4 | U$57.1 45.4,118.83 45.4,117.16
  Bottom 0.406: v56.52,87.63 56.83,87.95 56.83,88.9 52.39,93.34 52.39,95.57 56.2,99.38 v56.2,103.19
BRAKEP  (via drill 0.38)
  Top 0.406: U$39.3 98.44,79.2 R19.2 97.16,80.52 97.16,87.95 96.52,88.58 96.52,95.57 95.89,96.2 95.89,103.19 95.25,103.82 95.25,117.47 97.47,119.7 v97.47,120.33
  Bottom 0.406: v97.47,120.33 98.36,121.22 98.36,143.9 J2.F4
BRAKEP2
  Top 0.406: U$43.3 98.42,85.52 98.42,87.12 R15.2 97.16,88.77 97.16,95.89 96.52,96.52 96.52,103.5 95.89,104.14 95.89,117.16 98.36,119.63 98.36,135.9 J2.F2
BRAKEP2B
  Top 0.406: U$1.P$76 85.49,53.66 91.76,53.66 94.93,56.83 94.93,60.96 97.47,63.5 101.6,63.5 102.55,64.45 102.55,69.85 101.92,70.48 101.92,75.88 101.28,76.52 101.28,83.5 100.97,83.82 100.33,83.82 | U$43.4 98.44,83.52 98.74,83.82 100.33,83.82 | U$43.1 100.32,83.83 100.33,83.82
BRAKEPB
  Top 0.406: U$1.P$75 92.09,54.94 94.3,57.15 94.3,61.28 97.16,64.14 101.28,64.14 101.92,64.77 101.92,69.53 101.28,70.17 101.28,75.56 100.97,75.88 100.33,75.88 | U$39.4 98.44,75.58 98.74,75.88 100.33,75.88 | U$39.1 100.32,75.89 100.33,75.88
CAN_RX
  Top 0.406: U$1.P$55 93.98,28.89 98.9,33.81 U1.4
CAN_TX
  Top 0.406: U$1.P$56 85.47,30.16 94.3,30.16 95.09,30.96 U1.1
CANH
  Top 0.406: U1.6 97.63,44.16 R7.1 99.73,45.12 100.33,45.72 100.33,48.9 102.23,50.8 105.41,50.8 107,52.39 107,72.07 106.36,72.71 106.36,78.11 105.73,78.74 105.73,132.72 105.82,132.81 105.82,135.83 J2.D2
CANL
  Top 0.406: U1.7 96.36,44.16 R3.1 94.58,45.12 94.3,45.4 94.3,47.31 97.47,50.48 100.97,50.48 101.92,51.44 105.09,51.44 106.36,52.7 106.36,71.75 105.73,72.39 105.73,77.79 105.09,78.42 105.09,132.56 J2.D1
CLUTCH-POT  (via drill 0.38)
  Top 0.406: v41.27,129.54 41.27,113.35 42.55,112.08 49.1,112.08 U$59.3
  Bottom 0.406: J1.C4 41.27,143.89 v41.27,129.54
CLUTCH-POTB  (via drill 0.38)
  Top 0.406: 50.8,113.98 50.8,114.62 51.12,114.94 53.98,114.94 54.93,113.98 54.93,103.5 v55.24,103.19 | 50.8,113.98 50.8,112.71 51.44,112.08 51.84,112.08 U$59.4 | U$59.1 50.79,113.97 50.8,113.98 | U$1.P$9 66.67,66.67 59.05,66.67 55.56,70.17 55.56,88.27 v55.88,88.58
  Bottom 0.406: v55.88,88.58 51.75,92.71 51.75,95.89 55.56,99.69 55.56,102.23 55.24,102.55 v55.24,103.19
COMRX
  Top 0.406: U2.9 101.12,33.81 92.39,25.08 86.04,25.08 84.77,23.81 U$1.P$52
COMTX
  Top 0.406: U$1.P$51 92.08,23.81 102.39,34.13 U2.10
DACCLR
  Top 0.406: U$1.P$23 47.09,63.72 46.04,64.77 46.04,76.52 44.13,78.42 44.13,79.38 44.45,79.69 45.09,79.69 46.04,80.64 46.04,81.92 46.32,82.19 U9.10
DACCS  (via drill 0.38)
  Top 0.406: U$1.P$28 48.99,54.83 47.62,56.2 46.35,56.2 45.4,57.15 45.4,76.2 43.5,78.11 v43.5,80.64 | v41.59,87.31 40.64,87.31 40.32,87 40.32,85.72 40.6,85.45 U9.2
  Bottom 0.406: v43.5,80.64 43.5,85.41 v41.59,87.31
ECU1  (via drill 0.38)
  Top 0.406: R64.2 103.87,54.21 Q1.3 103.87,57.83 v104.14,58.1
  Bottom 0.406: J2.C4 108.27,143.89 108.27,60.01 106.36,58.1 v104.14,58.1
ECU1L
  Top 0.406: U$1.P$67 88.92,44.78 96.52,52.39 100.01,52.39 100.65,53.02 100.65,55.24 100.97,55.56 101.55,55.56 Q1.2
ECU2  (via drill 0.38)
  Top 0.406: R63.2 100.06,54.21 Q2.3 100.33,57.1 v100.33,58.42
  Bottom 0.406: J2.D4 105.82,143.83 105.82,61.37 102.87,58.42 v100.33,58.42
ECU2L
  Top 0.406: U$1.P$68 85.46,46.04 89.22,46.04 95.25,52.07 95.25,53.34 97.79,55.88 Q2.2
ENCODER1  (via drill 0.38)
  Top 0.406: J1.G2 31.3,135.86 31.3,132.21 34.29,129.22 34.29,108.27 35.24,107.31 50.16,107.31 51.12,106.36 51.12,101.28 51.75,100.65 51.75,66.99 51.12,66.36 51.12,63.82 v51.44,63.5 | C32.1 R35.2 63.82,61.91 U$1.P$14
  Bottom 0.406: U$1.P$14 61.91,61.28 52.39,61.28 51.44,62.23 v51.44,63.5
ENCODER2  (via drill 0.38)
  Top 0.406: v32.38,129.86 33.66,128.59 33.66,107.95 34.92,106.68 49.85,106.68 50.48,106.05 50.48,100.97 51.12,100.33 51.12,67.63 v50.8,67.31 | C33.1 R36.2 62.23,60.01 61.91,60.33 61.91,63.82 U$1.P$15
  Bottom 0.406: v32.38,129.86 31.3,130.94 31.3,139.86 J1.G3 | U$1.P$15 59.37,66.36 51.75,66.36 v50.8,67.31
FUELTEMP  (1 unrouted)
  Top 0.406: J1.C2 41.27,135.89 41.27,130.81 43.69,128.4 R22.2 | 43.51,125.42 U$55.3 | 43.51,126.67 43.51,125.42 | 43.51,125.42 43.5,125.41
FUELTEMPB  (via drill 0.38)
  Top 0.406: 45.4,123.51 46.04,123.51 46.67,122.87 46.67,117.47 47.94,116.2 54.61,116.2 56.2,114.62 56.2,104.46 57.15,103.5 v57.15,103.19 | 45.4,123.51 44.13,123.51 43.51,122.89 U$55.4 | U$55.1 45.4,125.18 45.4,123.51 | U$1.P$7 67.94,67.94 59.69,67.94 56.83,70.8 56.83,86.68 v57.47,87.31
  Bottom 0.406: v57.47,87.31 57.47,89.22 53.02,93.66 53.02,95.25 56.83,99.06 56.83,102.23 57.15,102.55 v57.15,103.19
GEARPOSAN  (via drill 0.38)
  Top 0.406: U$49.3 98.44,116.19 v98.42,116.52 | v96.52,120.02 95.79,120.75 95.79,139.87 J2.H3
  Bottom 0.406: v98.42,116.52 98.42,118.11 v96.52,120.02
GEARPOSANB
  Top 0.406: U$1.P$71 90.82,49.86 96.84,55.88 96.84,60.01 98.42,61.59 102.55,61.59 104.46,63.5 104.46,70.8 103.82,71.44 103.82,76.83 103.19,77.47 103.19,84.45 102.55,85.09 102.55,92.08 101.92,92.71 101.92,99.69 101.28,100.33 101.28,107.31 100.97,107.63 100.33,107.63 | U$49.4 98.44,107.33 98.74,107.63 100.33,107.63 | U$49.1 100.32,107.64 100.33,107.63
GND  (via drill 0.38)  (1 unrouted)
  Top 0.305: 118.43,119.38 119.06,120.02 119.06,122.24 v118.75,122.56
  Top 0.406: U$40.2 91.76,91.31 C19.1 | U$30.2 91.76,97.66 C20.1 | U$37.2 91.76,84.96 C22.1 | U$33.2 99.38,72.26 C25.1 | U$57.2 44.45,119.89 C31.1 | C38.2 118.43,119.38 118.75,119.7 | U5.11 115.9,116.85 v115.89,116.84
  other vias: 97.16,48.26 73.03,67.63 76.52,69.22 33.02,98.11 93.98,44.13 93.98,40.96 53.02,110.81 47.62,113.98 118.43,112.39 111.76,112.39 67.94,83.19 58.74,87.31 67.94,91.76 62.87,87.31 93.66,97.79 102.55,101.28 102.55,106.05 102.55,107.95 97.47,73.98 97.47,76.2 97.47,78.42 41.59,80.33 40.01,81.6 48.9,84.14 50.16,84.14
  pour Top: 7.94,5.4 7.94,74.93 23.81,74.93 23.81,133.67 20.95,136.53 20.95,141.29 19.37,142.88 13.65,142.88 11.43,145.1 7.94,145.1 7.94,165.1 119.06,165.1 119.06,5.4
  pour Bottom: 7.94,5.4 7.94,74.93 23.81,74.93 23.81,133.67 20.95,136.53 20.95,141.29 19.37,142.88 13.65,142.88 11.43,145.1 7.94,145.1 7.94,165.1 119.06,165.1 119.06,5.4
GND-RELAY
  Top 0.406: R28.2 13.53,77.66 13.65,77.79 18.73,77.79 19.05,78.11 19.05,81.92 | R23.2 D7.A | R20.2 D6.A | R16.2 D5.A | R10.2 D4.A | R9.2 D3.A
  Top 0.61: OK2.4 15.19,118.43 D3.A | OK1.4 15.19,127.64 D1.A | OK3.4 15.19,109.22 D4.A | OK4.4 15.19,100.01 D5.A | OK5.4 15.19,90.81 D6.A | OK6.4 15.19,81.6 D7.A
  Top 0.813: 19.39,127.64 19.39,118.43 | 19.39,118.43 19.39,109.22 | 19.39,109.22 19.39,100.01 | 19.39,100.01 19.39,90.81 | 19.39,90.81 19.39,84.16 19.37,84.14 19.37,82.23 19.05,81.92 18.73,81.6 OK6.4 | 19.39,127.64 OK1.4 | OK2.4 19.39,118.43 | OK3.4 19.39,109.22 | OK4.4 19.39,100.01 | OK5.4 19.39,90.81 | J1.K1 22.57,128.29 21.91,127.64 19.39,127.64
GSENS  (via drill 0.38)
  Top 0.406: J1.A2 47.94,134.22 47.94,118.11 48.58,117.47 55.24,117.47 66.67,106.05 81.6,106.05 83.82,103.82 83.82,92.71 v75.25,84.14 | v72.07,76.83 72.07,74.14 R4.2
  Bottom 0.406: v75.25,84.14 72.07,80.96 v72.07,76.83
GSENSO
  Top 0.406: R33.1 72.25,72.38 U$24.4 74.94,72.38 75.25,72.07 75.25,70.5 | U$24.1 75.25,70.5 | 75.25,70.5 75.25,68.58 73.34,66.67 U$1.P$5
HB1-DIR
  Top 0.406: U4.6 35.88,57.46 41.05,52.29 U$1.P$29
HB1-DIR-IN  (via drill 0.38)
  Top 0.406: v27.3,131.13 27.62,130.81 27.94,130.81 32.38,126.36 32.38,107.31 35.88,103.81 U4.15
  Bottom 0.406: v27.3,131.13 26.35,132.08 26.35,143.81 J1.J4
HB1-EN
  Top 0.406: U4.7 36.53,57.76 40.64,53.66 47.62,53.66 48.26,53.02 48.26,52.7 48.67,52.29 U$1.P$30
HB1-EN-IN
  Top 0.406: J1.H1 27.57,132.15 31.11,128.59 33.02,126.68 33.02,107.63 36.53,104.12 U4.14
HB1-PWM
  Top 0.406: U4.5 35.23,57.16 41.27,51.12 48.26,51.12 U$1.P$32
HB1-PWM-IN
  Top 0.406: J1.J3 26.35,139.81 26.35,130.81 26.99,130.18 27.62,130.18 31.75,126.05 31.75,107 35.23,103.51 U4.16
HB2-DIR
  Top 0.406: U4.3 33.94,56.55 41.91,48.58 48.26,48.58 U$1.P$34
HB2-DIR-IN  (via drill 0.38)
  Top 0.406: v24.77,129.22 25.08,128.91 26.99,128.91 30.48,125.41 30.48,106.36 33.94,102.91 U4.18
  Bottom 0.406: v24.77,129.22 23.81,130.18 23.81,143.85 J1.K4
HB2-EN
  Top 0.406: U4.1 32.63,56.9 42.32,47.21 U$1.P$33
HB2-EN-IN  (via drill 0.38)
  Top 0.406: v23.81,127.32 24.77,126.36 28.57,126.36 29.84,125.09 29.84,106.05 32.63,103.25 U4.20
  Bottom 0.406: v23.81,127.32 21.27,129.86 21.27,139.81 J1.K3
HB2-PWM
  Top 0.406: U4.4 34.59,56.85 41.69,49.75 U$1.P$31
HB2-PWM-IN
  Top 0.406: J1.J2 23.81,135.84 23.81,131.44 25.72,129.54 27.3,129.54 31.11,125.73 31.11,106.68 34.59,103.21 U4.17
IGNCUT  (via drill 0.38)
  Top 0.406: R17.2 94.27,122.27 v94.3,122.24
  Bottom 0.406: v94.3,122.24 87.31,115.25 87.31,76.52 86.04,75.25 71.75,75.25 69.53,73.03 69.53,63.82 U$1.P$10
IGNCUTO
  Top 0.406: J2.H1 94.56,128.58 Q3.3
MISO  (via drill 0.38)
  Top 0.406: U8.10 66.02,79.4 v66.04,79.38 | v50.16,66.36 50.16,63.5 51.44,62.23 51.44,57.15 50.48,56.2 48.9,56.2 47.72,57.37 U$1.P$25
  Bottom 0.406: v66.04,79.38 62.87,79.38 62.55,79.06 62.55,69.85 61.28,68.58 50.8,68.58 49.85,67.63 49.85,66.67 v50.16,66.36 | JP1.1 45.91,56.2 U$1.P$25
MOSI  (via drill 0.38)
  Top 0.406: v49.21,85.09 48.86,85.45 U9.15 46.08,85.45 v45.72,85.09 | v65.41,82.55 65.38,82.53 U8.9 | U$1.P$26 50.8,58.55 50.8,61.91 47.31,65.41 47.31,77.47 46.04,78.74 v46.04,79.38
  Bottom 0.406: v49.21,85.09 56.2,85.09 58.42,82.87 65.09,82.87 v65.41,82.55 | v46.04,79.38 46.04,84.77 v45.72,85.09 | JP1.2 48.26,58.74 U$1.P$26
N$1
  Top 0.406: R2.2 R1.2 70.6,148.2 IC2.4
N$2
  Top 1.016: IC2.2 67.2,144.17 L1.1 58.08,143.08 D8.C
N$3
  Top 0.406: OK1.6 16.07,122.56 R9.1
N$4
  Top 0.406: Q11.1 80.6,97.08 R32.2
N$5
  Top 0.406: OK3.6 16.07,104.14 R16.1
N$6
  Top 0.406: OK1.1 28.07,122.56 R11.1
N$7
  Top 0.406: U$24.3 75.28,73.72 R5.2 R4.1
N$8
  Top 0.406: OK4.6 16.07,94.93 R20.1
N$9
  Top 0.406: OK2.6 16.07,113.35 R10.1
N$10
  Top 0.406: OK2.1 28.07,113.35 R14.1
N$11
  Top 0.406: U5.16 112.7,119.96 R40.2 112.01,122.3 C34.1 112.08,122.75 R27.2
N$12
  Top 0.406: U1.5 98.9,41.43 98.42,40.96 97.47,40.96 97,41.43 C5.1 | R3.2 96.93,45.12 C5.1 | R7.2 97.06,45.12 C5.1
N$13
  Top 0.406: U2.6 103.66,46.7 C12.2
N$14
  Top 0.406: U2.4 106.2,46.7 C9.1
N$15
  Top 0.406: U5.15 113.36,119.96 R40.1 114.05,122.3 C34.2 113.98,122.75 R39.2
N$16
  Top 0.406: OK3.1 28.07,104.14 R18.1
N$17
  Top 0.406: U5.9 117.17,119.96 R43.2 117.86,122.3 C35.1 117.79,122.75 R41.2
N$18
  Top 0.406: U5.10 116.51,119.96 R43.1 115.82,122.3 C35.2 115.89,122.75 R42.2
N$19
  Top 0.406: OK4.1 28.07,94.93 R21.1
N$20
  Top 0.406: U2.5 104.93,46.7 C9.2
N$21
  Top 0.406: U2.3 107.47,46.32 C8.2
N$22
  Top 0.406: U2.1 110.01,46.32 C8.1
N$23
  Top 0.406: C11.1 108.93,42.83 108.74,43.02 U2.2
N$24
  Top 0.406: R17.1 92.74,125.34 Q3.1
N$25
  Top 0.406: OK5.6 16.07,85.72 R23.1
N$26
  Top 0.406: OK6.6 R28.1
N$27
  Top 0.406: OK5.1 28.07,85.72 R26.1
N$28
  Top 0.305: 117.92,114.62 117.98,114.62
  Top 0.406: 117.92,114.62 115.57,114.62 115.24,114.29 U5.5 115.24,111.77 115.57,111.44 117.79,111.44 118.43,110.81 118.43,85.72 115.89,83.19 U7.3 | 117.98,114.62 R44.1
N$29
  Top 0.406: R46.1 115.7,96.52 113.03,96.52 112.7,96.19 U6.5 112.7,83.17 110.81,81.28 U7.7
N$30
  Top 0.406: R30.2 69.53,90.49 70.17,91.12 70.17,92.71 69.24,93.64 S2.3
N$31
  Top 0.406: R45.1 111.89,114.62 114.3,114.62 114.63,114.29 U5.4 114.63,111.43 115.25,110.81 117.47,110.81 117.79,110.49 117.79,86.04 113.35,81.6 U7.5
N$32
  Top 0.406: U$19.3 81.63,73.72 R8.2 R6.1
N$33
  Top 0.406: R47.1 109.67,96.52 111.76,96.52 112.09,96.19 U6.4 112.09,83.52 110.17,81.6 110.17,76.83 109.54,76.2 U7.9
N$34
  Top 0.406: Q1.1 102.11,58.02 R24.2
N$35
  Top 0.406: Q2.1 98.3,58.02 R25.2
N$36
  Top 0.406: U6.16 110.16,101.55 R50.2 109.47,103.89 C36.1 109.54,104.33 R48.2
N$38
  Top 0.406: OK6.1 28.07,76.52 R29.1
N$39
  Top 0.406: U6.9 114.63,101.55 R53.2 115.32,103.89 C37.1 115.25,104.33 R51.2
N$40
  Top 0.406: U6.10 113.97,101.55 R53.1 113.28,103.89 C37.2 113.35,104.33 R52.2
N$41
  Top 0.406: U6.15 110.82,101.55 R50.1 111.51,103.89 C36.2 111.44,104.33 R49.2
N$42
  Top 0.406: U8.1 74.7,86.64 R55.2 R54.1
N$43
  Top 0.406: U8.2 67.97,87.66 68.26,87.95 69.98,87.95 R31.2 R30.1
N$46
  Top 0.406: R56.2 64.14,91.25 64.14,92.71 63.21,93.64 S3.3
N$53
  Top 0.406: U8.3 67.33,87.92 66.36,88.9 R57.2 R56.1
N$57
  Top 0.406: S1.3 75.28,93.64 76.2,92.71 76.2,91.25 R54.2
N$62
  Top 0.406: R58.2 57.34,90.68 58.1,91.44 58.1,92.71 57.15,93.66 56.38,93.66 S4.3
N$65
  Top 0.406: U8.4 66.67,85.41 66.36,85.09 62.67,85.09 R59.2 R58.1
NEUTRAL
  Top 0.406: U$1.P$11 66.99,63.82 R37.2
  Bottom 0.406: U$1.P$11 68.9,68.26 68.9,73.34 71.44,75.88 85.72,75.88 86.68,76.83 86.68,115.57 92.06,120.95 J2.J1
OC1
  Top 0.406: R11.2 28.26,120.65 29.21,119.7 29.21,105.73 29.84,105.09 29.84,96.52 30.48,95.89 30.48,87.63 31.11,87 31.11,79.38 31.75,78.74 31.75,56.83 42.55,46.04 48.26,46.04 U$1.P$36
OC2
  Top 0.406: R14.2 28.26,105.73 29.21,104.78 29.21,96.2 29.84,95.57 29.84,87.31 30.48,86.68 30.48,79.06 31.11,78.42 31.11,56.52 42.96,44.67 U$1.P$35
OC3
  Top 0.406: R18.2 28.26,96.2 29.21,95.25 29.21,87 29.84,86.36 29.84,78.74 30.48,78.11 30.48,56.2 43.18,43.5 48.26,43.5 U$1.P$38
OC4
  Top 0.406: R21.2 28.26,87 29.21,86.04 29.21,78.42 29.84,77.79 29.84,55.88 43.59,42.13 U$1.P$37
OC5
  Top 0.406: R26.2 28.26,78.42 29.21,77.47 29.21,55.56 43.81,40.96 48.26,40.96 U$1.P$40
OC6
  Top 0.406: R29.2 28.26,55.56 44.23,39.59 U$1.P$39
OILP
  Top 0.406: J1.C1 40.06,112.02 41.59,110.49 51.75,110.49 54.29,107.95 54.29,102.87 55.24,101.92 60.96,101.92 61.59,101.28 66.67,101.28 67.31,100.65 72.39,100.65 72.71,100.33 72.71,97.16 73.23,96.64 S1.2
OILPI  (via drill 0.38)
  Top 0.406: R38.2 59.05,60.96 U$1.P$16 60.64,63.5 59.37,64.77 59.37,65.41 54.93,69.85 54.93,92.39 v55.24,92.71 | v73.98,99.06 73.98,98.14 S1.1 74.27,98.14
  Bottom 0.406: v55.24,92.71 55.24,93.66 57.15,95.57 61.28,95.57 61.91,96.2 66.67,96.2 69.53,99.06 v73.98,99.06
RLY1
  Top 0.61: OK1.5 15.19,125.09 D1.C 14.65,125.36 13.34,126.68 13.34,129.22 15.88,131.76 17.73,131.76 J1.L1
RLY2
  Top 0.61: OK2.5 15.19,115.89 D3.C 14.65,116.16 12.38,118.43 12.38,130.12 J1.M1
RLY3
  Top 0.61: J1.L2 16.59,134.62 14.61,134.62 11.43,131.44 11.43,110.17 14.65,106.95 D4.C 15.19,106.68 OK3.5
RLY4
  Top 0.61: J1.M2 10.48,132.21 10.48,101.92 14.65,97.74 D5.C 15.19,97.47 OK4.5
RLY5
  Top 0.61: J1.L3 16.71,138.75 14.61,138.75 9.53,133.67 9.53,93.66 14.65,88.53 D6.C 15.19,88.27 OK5.5
RLY6
  Top 0.61: J1.M3 8.57,134.31 8.57,85.41 14.65,79.33 D7.C 15.19,79.06 OK6.5
RPM1
  Top 0.406: U7.10 110.81,47.62 113.98,44.45 113.98,34.29 110.81,31.11 102.55,31.11 93.98,22.54 85.47,22.54 U$1.P$50
RPM1GIN
  Top 0.406: J2.B4 110.83,143.83 112.39,143.83 113.35,142.88 113.35,140.65 115.89,138.11 R42.1
RPM1IN
  Top 0.406: J2.A4 113.98,143.17 113.98,140.97 117.79,137.16 R41.1
RPM2
  Top 0.406: U7.6 112.08,76.83 111.44,76.2 111.44,47.94 114.62,44.77 114.62,33.97 111.12,30.48 102.87,30.48 93.66,21.27 U$1.P$49
RPM2GIN
  Top 0.406: J2.B3 110.95,139.7 112.39,139.7 114.62,137.48 114.62,128.91 112.14,126.43 R27.1
RPM2IN
  Top 0.406: J2.A3 115.25,137.9 115.25,128.27 113.98,127 R39.1
RPM3
  Top 0.406: U7.4 114.62,78.11 112.71,76.2 112.71,73.66 112.08,73.03 112.08,48.26 115.25,45.09 115.25,33.66 111.44,29.84 103.19,29.84 93.34,20 85.47,20 U$1.P$48
RPM3GIN
  Top 0.406: J2.B2 111.08,135.57 112.71,135.57 113.35,134.94 113.35,129.54 112.08,128.27 110.49,128.27 109.86,127.64 109.86,112.08 111.12,110.81 112.71,110.81 113.35,110.17 R52.1
RPM3IN
  Top 0.406: J2.A2 113.98,135.17 113.98,129.22 112.39,127.64 110.81,127.64 110.49,127.32 110.49,112.39 111.44,111.44 113.67,111.44 115.25,109.86 R51.1
RPM4
  Top 0.406: U7.2 117.16,79.06 113.98,75.88 113.98,73.66 112.71,72.39 112.71,48.58 115.89,45.4 115.89,33.34 111.76,29.21 103.5,29.21 93.03,18.73 88.58,18.73 87.31,17.46 83.5,17.46 82.87,18.1 82.87,24.45 83.5,25.08 85.09,25.08 85.72,25.72 86.11,25.72 U$1.P$53
RPM4GIN
  Top 0.406: J2.B1 109.56,129.24 108.58,128.27 108.58,111.44 109.54,110.49 R48.1
RPM4IN
  Top 0.406: J2.A1 112.06,129.2 111.76,128.91 110.17,128.91 109.22,127.95 109.22,111.76 110.81,110.17 111.12,110.17 111.44,109.86 R49.1
RS232RX
  Top 0.406: U2.8 101.12,48.74 102.55,50.16 105.73,50.16 107.63,52.07 107.63,72.39 107,73.03 107,78.42 106.36,79.06 106.36,132.4 106.52,132.56 J2.C1
RS232TX
  Top 0.406: U2.7 102.39,49.05 102.87,49.53 106.05,49.53 108.27,51.75 108.27,72.71 107.63,73.34 107.63,78.74 107,79.38 107,131.13 108.27,132.4 108.27,135.89 J2.C2
SCK  (via drill 0.38)
  Top 0.406: v49.53,86.68 48.96,86.11 U9.16 45.15,86.11 v45.09,86.04 | v66.67,83.19 U8.11 | U$1.P$24 49.62,62.13 46.67,65.09 46.67,77.15 v45.09,78.74
  Bottom 0.406: v49.53,86.68 55.56,86.68 58.74,83.5 66.36,83.5 v66.67,83.19 | v45.09,78.74 45.09,84.45 44.77,84.77 44.77,85.72 v45.09,86.04 | JP1.3 48.26,61.28 U$1.P$24
SPEED  (via drill 0.38)
  Top 0.406: U$33.3 98.44,71.42 96.52,73.34 96.52,87.63 95.89,88.27 95.89,95.25 95.25,95.89 95.25,102.87 94.61,103.5 v94.61,118.11
  Bottom 0.406: v94.61,118.11 95.79,119.28 95.79,138.53 95.25,139.06 94.09,139.06 J2.J3
SPEEDB
  Top 0.406: U$1.P$77 93.04,57.48 93.66,58.1 93.66,61.59 96.84,64.77 100.97,64.77 101.28,65.09 101.28,69.22 100.97,69.53 100.33,69.53 | U$33.4 98.44,69.23 98.74,69.53 100.33,69.53 | U$33.1 100.32,69.55 100.33,69.53
TRAVEL1
  Top 0.406: U$30.3 90.81,96.63 90.81,96.84 89.53,98.11 89.53,129.86 87.31,132.08 87.31,139.84 J2.L3
TRAVEL1B  (via drill 0.38)
  Top 0.406: U$30.4 90.82,94.63 91.12,94.93 92.71,94.93 | 92.71,94.93 92.71,96.61 U$30.1 | v95.25,65.72 95.57,66.04 95.57,67.63 95.25,67.94 95.25,87 94.61,87.63 94.61,93.66 93.34,94.93 92.71,94.93
  Bottom 0.406: U$1.P$1 79.06,65.72 93.03,65.72 93.34,65.41 94.93,65.41 v95.25,65.72
TRAVEL2
  Top 0.406: U$34.3 90.81,114.73 90.81,129.54 87.95,132.4 87.95,143.21 J2.L4
TRAVEL2B  (via drill 0.38)
  Top 0.406: U$34.4 90.82,100.98 91.12,101.28 92.7,101.28 | U$34.1 92.7,101.28 | 92.7,101.28 93.34,101.28 94.61,100.01 94.61,95.57 95.25,94.93 95.25,87.95 95.89,87.31 95.89,68.26 96.2,67.94 96.2,65.41 v95.89,65.09
  Bottom 0.406: U$1.P$2 80.96,65.09 92.71,65.09 93.03,64.77 95.57,64.77 v95.89,65.09
TRAVEL3
  Top 0.406: 90.81,83.91 U$37.3 90.81,83.93 90.81,84.14 89.53,85.41 89.53,90.81 88.9,91.44 88.9,96.84 88.27,97.47 88.27,129.22 85.72,131.76 85.41,131.76 84.77,132.4 84.77,135.81 J2.L2
TRAVEL3B  (via drill 0.38)
  Top 0.406: U$37.4 90.82,81.93 91.12,82.23 92.7,82.23 | U$37.1 92.7,82.23 | 92.7,82.23 93.66,82.23 93.98,81.92 v93.98,66.99
  Bottom 0.406: U$1.P$3 77.79,66.99 v93.98,66.99
TRAVEL4
  Top 0.406: U$40.3 90.81,90.28 90.81,90.49 89.53,91.76 89.53,97.16 88.9,97.79 88.9,129.54 86.06,132.38 J2.L1
TRAVEL4B  (via drill 0.38)
  Top 0.406: U$40.4 90.82,88.28 91.12,88.58 92.7,88.58 | U$40.1 92.7,88.58 | 92.7,88.58 93.66,88.58 93.98,88.25 93.98,87.31 94.61,86.68 94.61,67.63 94.93,67.31 94.93,66.67 v94.61,66.36
  Bottom 0.406: U$1.P$4 77.15,63.82 77.15,65.41 78.11,66.36 93.34,66.36 93.66,66.04 94.3,66.04 v94.61,66.36
VCC
  Bottom 1.016: PTC2.P$2 35.58,161.61 J1.L4
VOUT  (via drill 0.38)
  Top 0.406: v32.07,128.91 28.8,132.18 28.8,139.87 J1.H3 | U9.6 40.34,82.86 39.69,83.5 v39.69,98.74
  Bottom 0.406: v32.07,128.91 32.56,128.41 32.56,107.14 39.69,100.01 v39.69,98.74
VTEMP
  Top 0.406: J2.F1 99.56,119.88 96.52,116.84 96.52,104.46 97.16,103.82 97.16,96.71 R13.2 98.44,95.07 U$45.3
VTEMP2
  Top 0.406: U$47.3 98.42,101.4 98.42,103 R12.2 97.16,104.65 97.16,116.52 100.81,120.17 100.81,139.85 J2.F3
VTEMP2B
  Top 0.406: U$1.P$74 85.49,51.12 91.12,51.12 96.2,56.2 96.2,60.33 98.11,62.23 102.23,62.23 103.82,63.82 103.82,70.48 103.19,71.12 103.19,76.52 102.55,77.15 102.55,84.14 101.92,84.77 101.92,91.76 101.28,92.39 101.28,99.38 100.97,99.69 100.33,99.69 | U$47.4 98.44,99.39 98.74,99.69 100.33,99.69 | U$47.1 100.32,99.71 100.33,99.69
VTEMPB
  Top 0.406: U$1.P$73 91.45,52.4 95.57,56.52 95.57,60.64 97.79,62.87 101.92,62.87 103.19,64.14 103.19,70.17 102.55,70.8 102.55,76.2 101.92,76.83 101.92,83.82 101.28,84.45 101.28,91.44 100.97,91.76 100.33,91.76 | U$45.4 98.44,91.45 98.74,91.76 100.33,91.76 | U$45.1 100.32,91.77 100.33,91.76
YAW  (via drill 0.38)
  Top 0.406: J1.A3 48.58,137.59 48.58,118.43 48.9,118.11 55.56,118.11 66.99,106.68 81.92,106.68 84.45,104.14 84.45,92.08 v78.42,86.04 | v78.42,76.83 78.45,76.8 R6.2
  Bottom 0.406: v78.42,86.04 v78.42,76.83
YAWO
  Top 0.406: R34.1 78.6,72.38 U$19.4 81.28,72.39 81.6,72.07 81.6,70.5 | U$1.P$6 74.61,63.82 74.61,66.36 75.88,67.63 80.33,67.63 81.6,68.9 81.6,70.5 | U$19.1 81.6,70.5

## Text on the board
tNames: Connector 2 | Connector 1
tSilk: 5V | 12V | 3,3V | + | AUX POWER | + | INT | INT | INT | INT | ADC | ADC | ADC | ADC | GND | SPI | SCK | MOSI | MISO | Traction control unit / Auxiliary sensor board / Version 2